# Altium PCB SE2D v1.0.PcbDoc
Units mil, origin at the board's own origin, x right, y up, seen from the top; angles counter-clockwise.
Board outline 1968.5 x 984.25 mil, 2 copper layers (Top Layer, Bottom Layer), stack 12.8 mil thick; 19 components, 8 nets, 46 pads, 24 vias.
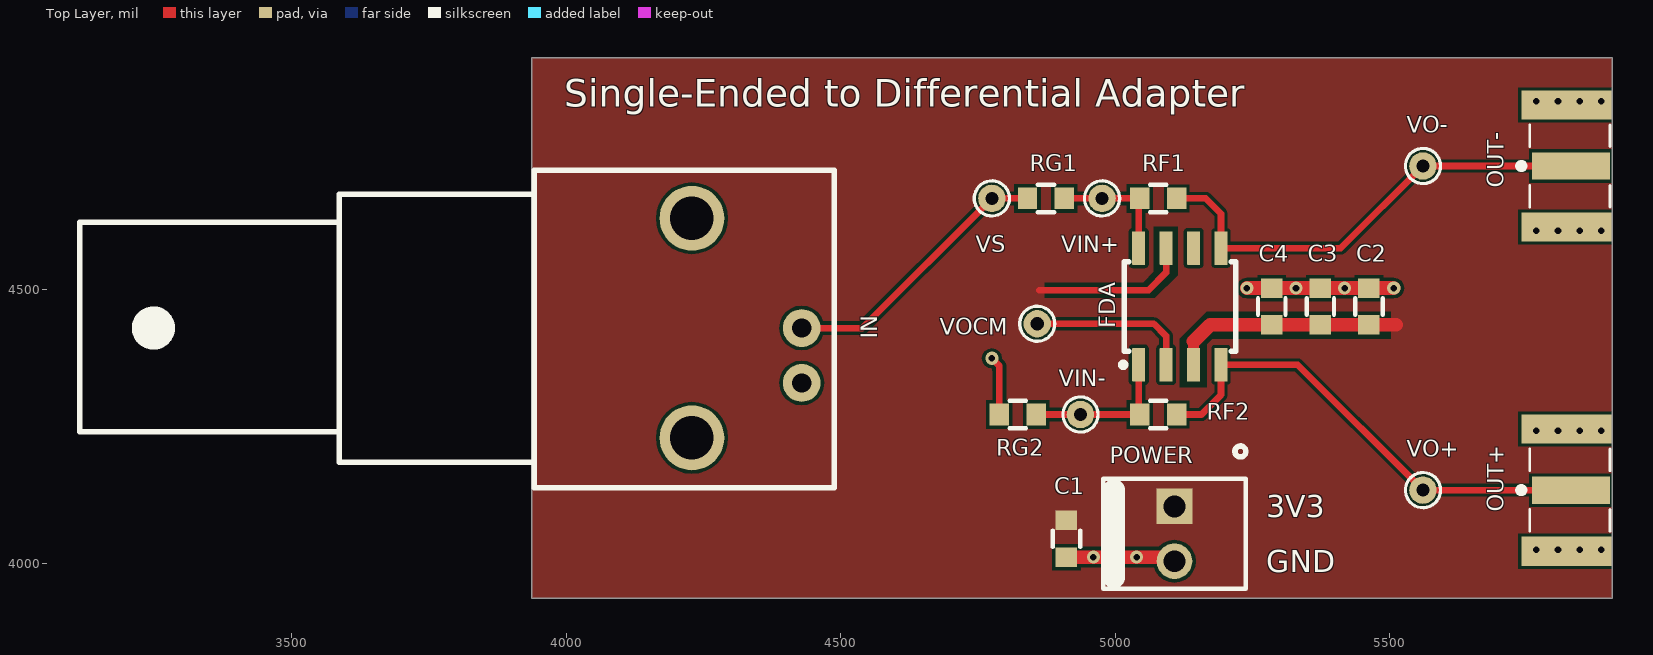
[diagram p0: Top Layer view]
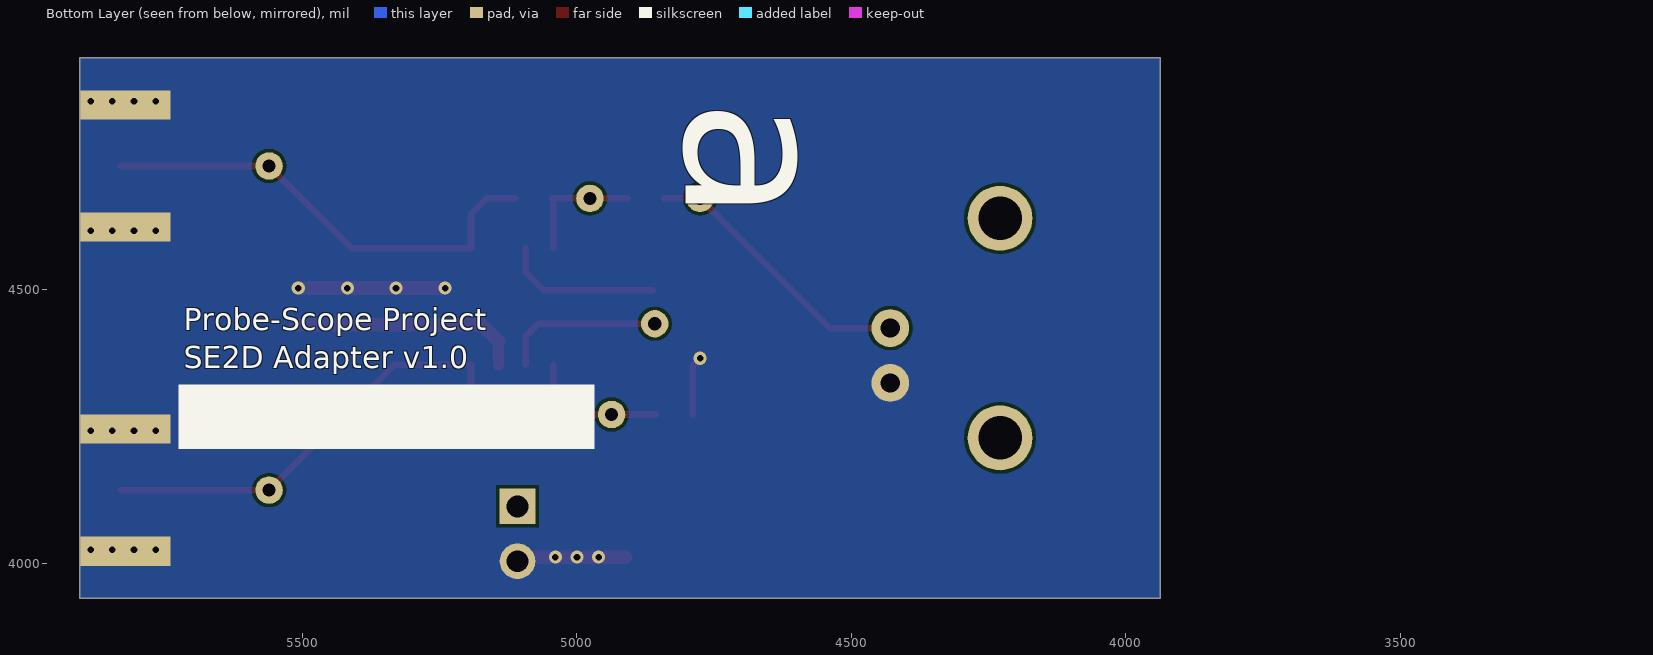
[diagram p1: Bottom Layer view, seen from below]

## Layer stack, top to bottom
Top Solder: solder mask 0.4, Solder Resist, Dk 3.5
Top Layer: signal copper 1.4
Dielectric 1: core 10, Dk 4.2
Bottom Layer: signal copper 1.4
Bottom Solder: solder mask 0.4, Solder Resist, Dk 3.5

## Board outline
3937.01,3937.01 5905.51,3937.01 5905.51,4921.26 3937.01,4921.26

## Design rules (kind name [scope] priority, off if disabled: settings)
Clearance BGAClearance [All vs HasFootprint('Cypress-VAA024')] p1: gap=7.88 ignorepadtopadclearanceinfootprint=FALSE except(0: Arc-Hole Track-Hole SMDPad-Hole THPad-Hole Via-Hole Fill-Hole Poly-Hole Region-Hole Text-Hole; 13.79: SMDPad-SMDPad)
Clearance [All] p2: gap=6 ignorepadtopadclearanceinfootprint=FALSE except(0: Arc-Hole Track-Hole SMDPad-Hole THPad-Hole Via-Hole Fill-Hole Poly-Hole Region-Hole Text-Hole)
DiffPairsRouting [All] p1: maxlimit=10 minlimit=6 mostfreqgap=8 toplayer_minwidth=6 toplayer_maxwidth=15 toplayer_prefwidth=8 bottomlayer_minwidth=6 bottomlayer_maxwidth=15 bottomlayer_prefwidth=8 maxuncoupledlength=500
HoleSize [All] p1: absolutevalues=TRUE maxlimit=200 minlimit=12 maxpercent=80.000 minpercent=20.000
HoleToHoleClearance ViaToViaClearance [IsVia vs IsVia] p1: gap=6 allowstackedmicrovias=TRUE
HoleToHoleClearance [All] p2: gap=10 allowstackedmicrovias=TRUE
PolygonConnect [All] p1: connectstyle=Direct reliefconductorwidth=10 reliefentries=4 polygonreliefangle="90 Angle" airgapwidth=10
RoutingVias [All] p1: holewidth=12 width=24 viastyle="Through Hole" minholewidth=12 minwidth=24 maxholewidth=28 maxwidth=50
SolderMaskExpansion [All] p1: expansion=4
Width [All] p1: maxlimit=100 minlimit=6 preferedwidth=8
27 further rules are at their usual default settings.

## Components (designator, comment, footprint, x,y, rotation, side; value= is the part's Value field where it differs from the comment)
C1 "25V" 0603(1608) 4911.42,4045.28 r90 top value=10uF
C2 "25V" 0603(1608) 5462.6,4468.5 r270 top value=1uF
C3 "50V" 0603(1608) 5374.02,4468.5 r270 top value=0.1uF
C4 "50V" 0603(1608) 5285.43,4468.5 r270 top value=0.01uF
FDA "THS4521" TI_D0008A 5118.11,4468.5 r90 top
IN "R/A" "BNC - Right Angle" 4429.13,4429.13 r90 top
OUT+ "SMA-J-P-H-ST-EM1" *SMA-J-P-H-ST-EM1_SMA-J-P-H-ST-EM1(Primary) 5830.71,4133.86 r90 top
OUT- "SMA-J-P-H-ST-EM1" *SMA-J-P-H-ST-EM1_SMA-J-P-H-ST-EM1(Primary) 5830.71,4724.41 r90 top
POWER "*" 0.1HDR1X2P 5108.27,4105.39 r270 top
RF1 "Res1" 0603(1608) 5078.74,4665.35 r0 top value=1.00k
RF2 "Res1" 0603(1608) 5078.74,4271.65 r0 top value=1.00k
RG1 "Res1" 0603(1608) 4874.02,4665.35 r0 top value=1.00k
RG2 "Res1" 0603(1608) 4822.83,4271.65 r0 top value=1.00k
VIN+ "TP" TESTPOINT024 4976.38,4665.35 r0 top
VIN- "TP" TESTPOINT024 4937.01,4271.65 r0 top
VO+ "TP" TESTPOINT024 5561.02,4133.86 r0 top
VO- "TP" TESTPOINT024 5561.02,4724.41 r0 top
VOCM "TP" TESTPOINT024 4858.27,4437.01 r0 top
VS "TP" TESTPOINT024 4775.59,4665.35 r0 top

## Footprints (in the part's own frame and the unit in brackets; to place one, negate y for a bottom-side part, rotate by r counter-clockwise, add the part's x,y. Pads: shape width x height; smd on the part's side, far side on the other; paste and mask are expansions set on the pad)
0.1HDR1X2P [mil] "Connector; Header; 2 Position; Locking; Polarized"
  rect 65x65 hole 40: 1(1.06,0)
  round 65 hole 40: 2(101.06,0)
  silkscreen extent -109,-130 151,130
0603(1608) [mm] "Chip, Body 1.6x0.8mm, IPC Medium Density"
  rect 0.9x1 smd: 1(-0.85,0) 2(0.85,0)
  silkscreen extent -0.38,-0.64 0.38,0.64, body extent -0.85,-0.48 0.85,0.48, height 0.6
*SMA-J-P-H-ST-EM1_SMA-J-P-H-ST-EM1(Primary) [mm]
  rect 1.27x3.6 smd: 1(0,0)
  rect 1.35x4.2 smd: 2(-2.825,0.2) 2(2.825,0.2)
  rect 1.35x4.2 smd far side: 2(-2.825,0.2) 2(2.825,0.2)
  silkscreen extent -1.9,-1.8 1.9,2.44, body extent -3.2,-11.44 3.15,1.89, height 3.77
"BNC - Right Angle" [mm] "Tyco 1-1337543-0"
  round 3 hole 2.01: 0(-5.08,5.08) 0(5.08,5.08)
  round 1.75 hole 0.89: 1(0,0) 2(-2.54,0)
  silkscreen extent -7.4,-1.5 7.3,33.4, body extent -7.4,-1.5 7.3,33.3, height 15.8
TESTPOINT024 [mil]
  round 50 hole 24: 1(0,0)
  silkscreen extent -32,-32 32,32
TI_D0008A [mm] "SOIC-8, 3.9x4.9mm (TI D0008A)"
  rrect8% 1.55x0.6 smd: 1(-2.7,1.905) 2(-2.7,0.635) 3(-2.7,-0.635) 4(-2.7,-1.905) 5(2.7,-1.905) 6(2.7,-0.635) 7(2.7,0.635) 8(2.7,1.905)
  silkscreen extent -2.81,-2.58 2.08,2.74, body extent -1.95,-2.45 1.95,2.45, height 1.75

## Part data
C1: library part 1306, Max Temperature=85, Package=0603, Tolerance=20, Voltage=25, Approved=True, Class=Capacitor, Date Modified="3/3/2015 11:08:29 AM", Key=1306, MANF="Samsung Electro-Mechanics", MANF_PN=CL10A106MA8NRNC, MENG_PN=???1306, Modified By=sotterbacher, Other=X5R, P&V Description="Capacitor, Ceramic, 10uF, 25V, 20% Tol, 85C, X5R, 0603, SMD", Parent Key=1306, SMD=True, Type=Ceramic, VENDOR=Digikey, VENDOR_PN=1276-1869-1-ND, Verified=True
C2: library part 1145, Max Temperature=125, Package=0603, Tolerance=10, Voltage=25, Approved=True, Class=Capacitor, Date Modified="5/24/2014 3:50:24 PM", Key=1145, MANF="Taiyo Yuden", MANF_PN=TMK107BJ105KA-T, MENG_PN=???1145, Modified By=pmarcus, Other=X5R, P&V Description="Capacitor, Ceramic, 1uF, 25V, 10% Tol, 125C, X5R, 0603, SMD", Parent Key=1145, SMD=True, Type=Ceramic, VENDOR=Digikey, VENDOR_PN=587-1248-1-ND, Verified=True
C3: library part 751, Max Temperature=125, Package=0603, Tolerance=10, Voltage=50, Approved=True, Class=Capacitor, Date Modified="10/21/2014 3:48:37 PM", Key=751, MANF="Samsung Electro-Mechanics", MANF_PN=CL10B104KB8SFNC, MENG_PN=???751, Modified By=pmarcus, Other=X7R, P&V Description="Capacitor, Ceramic, 0.1uF, 50V, 10% Tol, 125C, X7R, 0603, SMD", Parent Key=751, SMD=True, Type=Ceramic, VENDOR=Digikey, VENDOR_PN=1276-1936-1-ND, Verified=True
C4: library part 1703, Max Temperature=125, Package=0603, Tolerance=10, Voltage=50, Approved=False, Class=Capacitor, Date Modified="7/5/2018 1:16:07 PM", Key=1703, MANF="Samsung Electro-Mechanics", MANF_PN=CL10B103KB8NCNC, MENG_PN=???1703, Modified By=jrowley, Other=X7R, P&V Description="Capacitor, Ceramic, 0.01uF, 50V, 10% Tol, 125C, X7R, 0603, SMD", Parent Key=1703, SMD=True, Type=Ceramic, VENDOR=Digikey, VENDOR_PN=1276-1921-1-ND, Verified=False
FDA: library part THS4521IDR, MANF="Texas Instruments", MANF_PN=THS4521IDR, VENDOR=Digikey, VENDOR_PN=296-39226-1-ND
IN: library part 866, Approved=True, Class=Connector, Date Modified="9/26/2012 4:24:05 PM", Key=866, MANF=Tyco, MANF_PN=1-1337543-0, MENG_PN=???866, Modified By=pmarcus, Other="Right Angle, Plastic, 50 Ohm Termination, PCB", P&V Description="Connector, BNC, 1 Positions, Female, Right Angle, Plastic, 50 Ohm Termination, PCB", Parent Key=866, Positions=1, Sex=Female, SMD=False, Type=BNC, VENDOR=Digikey, VENDOR_PN=A97553-ND, Verified=True
POWER: library part 375, Current=4, Voltage=250, Approved=False, Class=Connector, Date Modified="7/21/2017 2:28:28 PM", Key=375, MANF=Molex, MANF_PN=22-11-2022, MENG_PN=CON00068, Modified By=jrowley, Other="0.24\" Long, 0.125\" Tail, 15u Select Gold, Polarized, Locking Ramp", P&V Description="Connector, Header, 0.1\", 2 Positions, Male, 0.1\" Spacing, 4A, 250V, 0.24\" Long, 0.125\" Tail, 15u Select Gold, Polarized, Locking Ramp", Parent Key=375, Positions=2, Sex=Male, SMD=False, Spacing=0.1, Type="Header, 0.1\"", VENDOR=Digikey, VENDOR_PN=WM2700-ND, Verified=False
RF1 RF2 RG1 RG2: library part 735, Package=0603, Power=0.1, Tolerance=1, Voltage=75, Approved=False, Class=Resistor, Date Modified="2/21/2018 9:28:06 AM", Expr1026=735, Key=735, MANF=Yageo, MANF_PN=RC0603FR-071KL, MENG_PN=???735, Modified By=khall, P&V Description="Resistor, Thick Film, 1.00k Ohms, 0.1W, 1% Tol, 75V, 0603, SMD", Parent Key=735, SMD=True, Type="Thick Film", VENDOR=Digikey, VENDOR_PN=311-1.00KHRCT-ND, Verified=False
VIN+ VIN- VO+ VO- VOCM VS: library part 49, Approved=True, Class=Connector, Date Modified="9/30/2014 10:31:54 AM", Key=49, MANF="Keystone Electronics", MANF_PN=1998-3, MENG_PN=CON00002, Modified By=sotterbacher, Other="Small, 0.27\" Straight Pin, 0.02\" dia", P&V Description="Connector, Test Point, 1 Positions, Male, Small, 0.27\" Straight Pin, 0.02\" dia", Parent Key=49, Positions=1, Sex=Male, SMD=False, Type="Test Point", VENDOR=Digikey, VENDOR_PN=1998-3K-ND, Verified=True
OUT+ OUT-: MANF="Samtec Inc.", MANF_PN=SMA-J-P-H-ST-EM1, VENDOR=Digikey, VENDOR_PN=SAM8857-ND

## Via types
v1: diameter 24, hole 12, Top Layer to Bottom Layer, 24 vias

## Nets (pads, with @x,y where several pads share a name; then routed paths per layer and width w, separated by ;. In a path a pad name is that pad's centre, name@x,y a point inside that pad or via, vN(x,y) a via of type N, cw(c..) or ccw(c..) an arc to the next point about the centre after c; other vN are vias at no path point)
+3.3V: C1.2 C2.2 C3.2 C4.2 FDA.3 FDA.7 POWER.1 | length 712.8
  Top Layer w12: 4862.2,4498.03 5061.02,4498.03 5093.11,4530.12 FDA.7
  Top Layer w20: FDA.3 5143.11,4404.92
  Top Layer w25: 5143.11,4404.92 5173.23,4435.04 C4.2 C3.2 C2.2 5511.81,4435.04
GND: C1.1 C2.1 C3.1 C4.1 FDA.6 IN.2 OUT+.2 OUT-.2 POWER.2 RG2.1 | length 575.7
  Top Layer w12: v1(4775.59,4374.02) 4789.37,4360.24 RG2.1
  Top Layer w25: C1.1 5100.79,4011.81 POWER.2 ; v1(5240.16,4501.97) C4.1 C3.1 C2.1 v1(5507.87,4501.97)
  other v1: 4960.63,4011.81 5000,4011.81 5039.37,4011.81 5767.72,4025.59 5807.09,4025.59 5846.46,4025.59 5885.83,4025.59 5767.72,4242.13 5807.09,4242.13 5846.46,4242.13 5885.83,4242.13 5329.72,4501.97 5418.31,4501.97 5767.72,4606.3 5807.09,4606.3 5846.46,4606.3 5885.83,4606.3 5767.72,4842.52 5807.09,4842.52 5846.46,4842.52 5885.83,4842.52
NetFDA_1: FDA.1 RF2.1 RG2.2 VIN-.1 | length 280.4
  Top Layer w12: RG2.2 RF2.1 ; RF2.1@5040.94,4271.65 5043.11,4273.82 FDA.1
NetFDA_2: FDA.2 VOCM.1 | length 296.6
  Top Layer w12: VOCM.1 5070.87,4437.01 5093.11,4414.76 FDA.2
NetFDA_4: FDA.4 OUT+.1 RF2.2 VO+.1 | length 882.8
  Top Layer w12: RF2.2 5157.48,4271.65 5193.11,4307.28 FDA.4 5332.68,4362.2 VO+.1 OUT+.1
NetFDA_5: FDA.5 OUT-.1 RF1.2 VO-.1 | length 854.8
  Top Layer w12: RF1.2 5165.35,4665.35 5193.11,4637.6 FDA.5 5411.42,4574.8 VO-.1 OUT-.1
NetFDA_8: FDA.8 RF1.1 RG1.2 VIN+.1 | length 229.2
  Top Layer w12: RG1.2 VIN+.1 RF1.1 5043.11,4663.19 FDA.8
NetIN_1: IN.1 RG1.1 VS.1 | length 509.3
  Top Layer w12: IN.1 4539.37,4429.13 VS.1 RG1.1
pads on no net: IN.0

## Polygon pours and split planes (outlines as drawn)
GND on Bottom Layer "GND_L02_P000" (solid, pour order 0): 3937.01,4921.26 5905.51,4921.26 5905.51,3937.01 3937.01,3937.01
+3.3V on Top Layer "+3.3V_L01_P002" (solid, pour order 2): 3937.01,4921.26 5905.51,4921.26 5905.51,3937.01 3937.01,3937.01

## Other copper
Top Layer:
  pour cut-out: 5167.32,4399.61 5177.17,4409.45 5501.97,4409.45 5501.97,4458.66 5167.32,4458.66 5118.11,4409.45 5118.11,4320.87 5167.32,4320.87
  pour cut-out: 5070.87,4531.5 5051.18,4511.81 4872.05,4511.81 4872.05,4484.25 5072.74,4484.25 5114.17,4525.68 5114.17,4614.17 5070.87,4614.17
  text ".Layer_Name" at 8750,5180 h100
Bottom Layer:
  text ".Layer_Name" at 8750,5000 h100

## Silkscreen, mask and mechanical layers (free items; w line width, h text height)
Top Overlay:
  text ".Layer_Name" at 8750,5540 h100
  text "Single-Ended to Differential Adapter" at 3996.06,4832.68 h50
  text "3V3" at 5275.59,4084.65 h40
  text "GND" at 5275.59,3984.65 h40
Bottom Overlay:
  region: 5726.38,4326.77 4968.5,4326.77 4968.5,4208.66 5726.38,4208.66
  text "a" at 4897.64,4846.46 h500 r90
  text ".Layer_Name" at 8750,4640 h100
  text "Probe-Scope Project" at 5716.54,4425.2 h40
  text "SE2D Adapter v1.0" at 5716.54,4356.3 h40
Top Paste:
  text ".Layer_Name" at 8750,5720 h100
Bottom Paste:
  text ".Layer_Name" at 8750,4460 h100
Top Solder:
  text ".Layer_Name" at 8750,5360 h100
Bottom Solder:
  text ".Layer_Name" at 8750,4820 h100
Board Outline:
  the board outline again, w10
  text ".Layer_Name" at 8750,4280 h100
Notes:
  text "Notes:" at 8865,7780 h60
  text "1. Base material is 0.062 thick FR4" at 8865,7690 h60
  text "2. Foils to finish at 1oz" at 8865,7605 h60
  text "3. All hole sizes are after plating" at 8865,7525 h60
  text "4. Soldermask with L.P.I, Color is Green" at 8865,7440 h60
  text "5. Soldercoat after soldermask" at 8865,7350 h60
  text "6. Silkscreen with white epoxy" at 8865,7260 h60
  text "7. Holes with zero diameter pads are unplated" at 8865,7165 h60
Title Block:
  lines w5: 1000,3125 1200,3125 ; 1000,5250 1200,5250 ; 1000,7375 1200,7375 ; 3750,1000 3750,1200 ; 3750,9300 3750,9500 ; 5075,1200 5075,1300 ; 6500,1000 6500,1200 ; 6500,9300 6500,9500 ; 7300,1600 11800,1600 ; 7300,1900 11800,1900 ; 7300,2200 8800,2200 ; 8800,1300 8800,1900 8800,2500 ; 9250,1000 9250,1200 ; 9250,9300 9250,9500 ; 10900,1300 10900,1900 ; 11800,3125 12000,3125 ; 11800,5250 12000,5250 ; 11800,7375 12000,7375 ; 5075,1300 5075,2500 7300,2500 ; 5075,1300 7300,1300 ; 7300,1300 7300,2500 ; 7300,1300 11800,1300 11800,2500 8800,2500 ; 7300,2500 8800,2500 ; 1000,1000 1000,9500 12000,9500 12000,1000 1000,1000 ; 1200,1200 11800,1200 11800,9300 1200,9300 1200,1200
  text "1" at 2351.34,9365 h70
  text "2" at 5102,9365 h70
  text "3" at 7847,9365 h70
  text "4" at 10598.01,9365 h70
  text "A" at 1075,8347 h70
  text "A" at 11875,8347 h70
  text "B" at 1075,6222 h70
  text "B" at 11875,6222 h70
  text "C" at 1075,4097 h70
  text "C" at 11875,4097 h70
  text "ENGINEER:" at 7350,2400 h45
  text "TITLE:" at 8850,2400 h45
  text "J. Rowley, M. Omo" at 7400,2280 h70
  text "PCB DESIGNER:" at 7350,2105 h45
  text "J. Rowley" at 7400,1980 h70
  text "D" at 1075,1977 h70
  text "D" at 11875,1977 h70
  text "PSDT Single-Ended to Differential Adapter" at 8900,1925 h140
  text "DATE:" at 7350,1800 h45
  text "PART NO.:" at 8850,1800 h45
  text "REV:" at 10950,1800 h45
  text "a" at 5540,1700 h787.4
  text ".PRINT_DATE" at 7400,1680 h70
  text ".revision" at 11000,1680 h70
  text "ASP0021" at 8875,1675 h70
  text "Unified USB Oscilloscope Probe" at 5150,1525 h70
  text "SHEET SIZE:" at 7350,1500 h45
  text "DWG NO:" at 8850,1500 h45
  text "SCALE:" at 10950,1500 h45
  text "Copyright 2019 M. Omo, J. Rowley, K. Hall" at 5143,1394.67 h70
  text "NONE" at 11000,1380 h70
  text "LETTER" at 7375,1375 h70
  text "CAD0021" at 8875,1375 h70
  text "Released under the CERN OHL v1.2" at 5143,1294.67 h70
  text "FILE PATH:" at 5100,1225 h45
  text ".PCB_FILE_NAME" at 5450,1225 h45
  text "1" at 2351.34,1065 h70
  text "2" at 5102,1065 h70
  text "3" at 7847,1065 h70
  text "4" at 10598.01,1065 h70